# Altium PCB open-weller-pen.PcbDoc
Units mm, origin at the board's own origin, x right, y up, seen from the top; angles counter-clockwise.
Board outline 60 x 9.5 mm, 4 copper layers (Top Layer, Int1 (GND), Int2 (PWR), Bottom Layer), stack 1.642 mm thick; 46 components, 32 nets, 175 pads, 15 vias.
Unrouted connection lines stored in the file: 104.
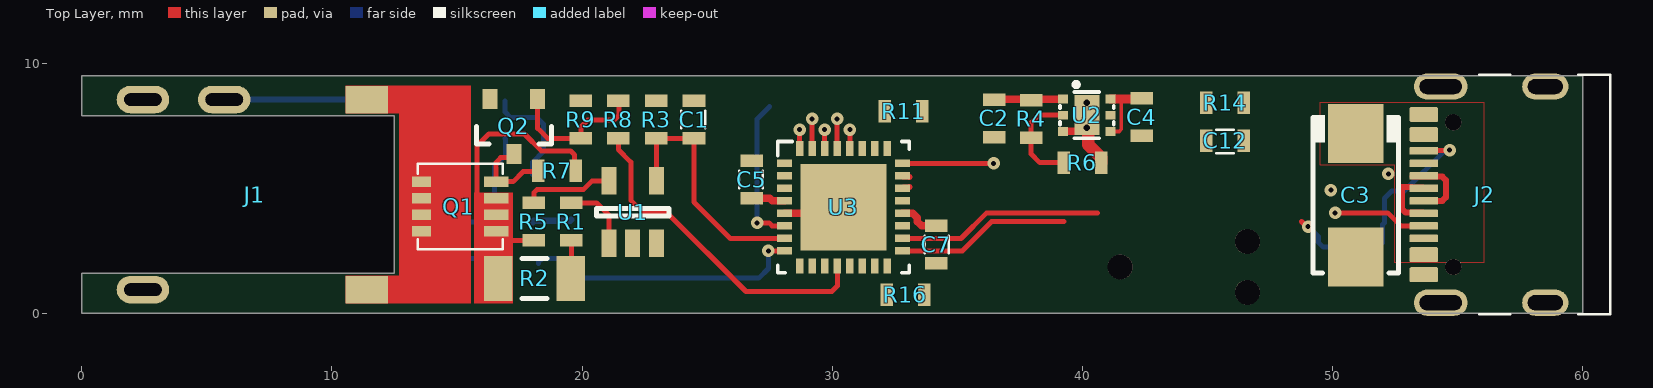
[diagram p0: Top Layer view]
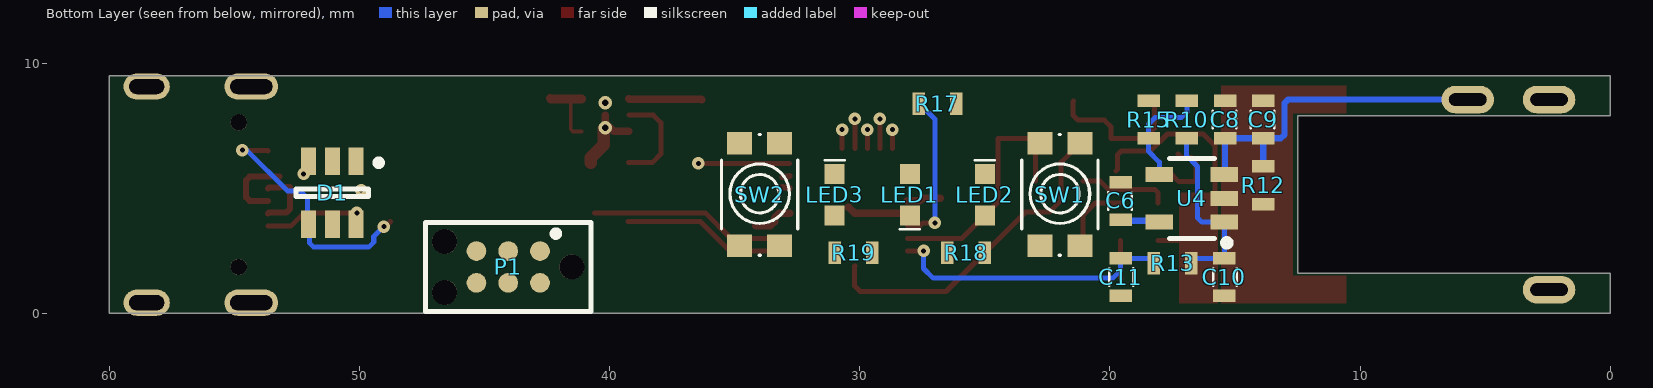
[diagram p1: Bottom Layer view, seen from below]
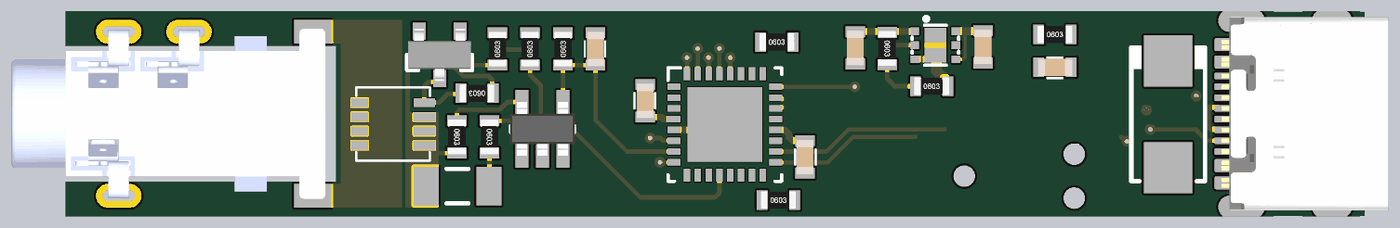
[diagram p2: 3D render of the assembled board from above, using the file's embedded part models]
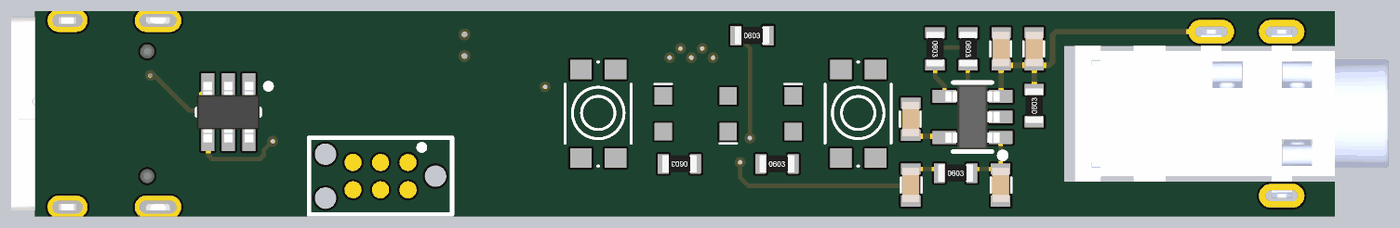
[diagram p3: 3D render of the assembled board from below, using the file's embedded part models]

## Layer stack, top to bottom
Top Solder: solder mask 0.0254, SM-001, Dk 4
Top Layer: signal copper 0.035
7628 1: prepreg 0.2184, PP-023, Dk 4.6
Int1 (GND): signal copper 0.035
CORE: core 1.065, Core-039, Dk 4.8
Int2 (PWR): signal copper 0.035
7628 2: prepreg 0.2184, PP-023, Dk 4.6
Bottom Layer: signal copper 0.035
Bottom Solder: solder mask 0.0254, SM-001, Dk 4

## Board outline
0,7.9 12.5,7.9 12.5,1.6 0,1.6 0,0 60,0 60,9.5 0,9.5

## Design rules (kind name [scope] priority, off if disabled: settings)
Clearance [All] p1: gap=0.15 ignorepadtopadclearanceinfootprint=FALSE except(0: Arc-Hole Track-Hole SMDPad-Hole THPad-Hole Via-Hole Fill-Hole Poly-Hole Region-Hole Text-Hole)
DiffPairsRouting [All] p1: maxlimit=0.254 minlimit=0.15 mostfreqgap=0.15 toplayer_minwidth=0.239 toplayer_maxwidth=0.239 toplayer_prefwidth=0.239 midlayer1_minwidth=0.239 midlayer1_maxwidth=0.239 midlayer1_prefwidth=0.239 midlayer2_minwidth=0.239 midlayer2_maxwidth=0.239 midlayer2_prefwidth=0.239 bottomlayer_minwidth=0.239 bottomlayer_maxwidth=0.239 bottomlayer_prefwidth=0.239 maxuncoupledlength=12.7
PolygonConnect [All] p1: connectstyle=Direct reliefconductorwidth=0.254 reliefentries=4 polygonreliefangle="90 Angle" airgapwidth=0.254
RoutingVias [All] p1: holewidth=0.711 width=1.27 viastyle="Through Hole" minholewidth=0.711 minwidth=1.27 maxholewidth=0.711 maxwidth=1.27
SolderMaskExpansion [All] p1: expansion=0.102 istentingtop=FALSE
Width [All] p1: maxlimit=1 minlimit=0.15 preferedwidth=0.5
29 further rules are at their usual default settings.

## Classes and differential pairs
differential pair USB: +USB_P -USB_N

## Components (designator, comment, footprint, x,y, rotation, side; value= is the part's Value field where it differs from the comment)
C1 "06035C104kAT2A" Generic_Cap0603_2_R 24.475,7.75 r270 top value=100n
C2 "GRM188R61E106KA73D" Generic_Cap0603_2_RW 36.475,7.8 r90 top
C3 "F931C107MCCAJ6" Generic_CPOL_C-2312_1P_2N_2 50.925,4.725 r270 top value=100u
C4 "GRM188R61E106KA73D" Generic_Cap0603_2_RW 42.375,7.85 r90 top
C5 "06035C104kAT2A" Generic_Cap0603_2_R 26.775,5.35 r270 top value=100n
C6 "06035C104kAT2A" Generic_Cap0603_2_R 19.575,4.5 r270 bottom value=100n
C7 "06035C104kAT2A" Generic_Cap0603_2_R 34.15,2.75 r90 top value=100n
C8 "06035C104kAT2A" Generic_Cap0603_2_R 15.4,7.75 r270 bottom value=100n
C9 "06035C103kAT2A" Generic_Cap0603_2_R 13.875,7.75 r270 bottom value=10n
C10 "06035C103kAT2A" Generic_Cap0603_2_R 15.425,1.45 r90 bottom value=10n
C11 "06035C104kAT2A" Generic_Cap0603_2_R 19.575,1.45 r90 bottom value=100n
C12 "06035C104kAT2A" Generic_Cap0603_2_R 45.7,6.9 r0 top value=100n
D1 "824015" GENERIC_SOT23-6_6_R 51.075,4.825 r270 bottom
J1 "SJ-3501-SMT-TR" CUI_SJ-3501-SMT-TR_5 0,4.75 r0 top
J2 "USB4105-GF-A" GCT_USB4105-GF-A_16_R 58.5,4.75 r90 top
LED1 "APT1608SURCK" Kingbright_1608_2_RW 28,4.75 r0 bottom locked
LED2 "APT1608SGC" Kingbright_1608_2_RW 25,4.75 r180 bottom locked
LED3 "APT1608SURCK" Kingbright_1608_2_RW 31,4.75 r180 bottom locked
P1 "TC2030-IDC-NL (SWD)" TagConnectLLC_TC2030_6 41.51,1.86 r0 bottom
Q1 "SQS141ELNW" Vishay_PowerPAK_1212-8_8 15.075,4.275 r180 top
Q2 "BSS138" Generic_SOT23_3_RWH 17.275,7.475 r180 top
R1 "RC0603FR-0733RL" Generic_Res0603_2_RW 19.575,3.675 r270 top value=33R
R2 "CSNL1206FT10L0" Generic_Res1206_2_RW 18.1,1.4 r180 top value=0.01R
R3 "RC0603FR-072K2L" Generic_Res0603_2_RW 22.975,7.75 r90 top value=2k2
R4 "RC0603FR-073K9L" Generic_Res0603_2_RW 37.95,7.775 r270 top value=3k9
R5 "RC0603FR-0733RL" Generic_Res0603_2_RW 18.075,3.675 r270 top value=33R
R6 "RC0603FR-072K2L" Generic_Res0603_2_RW 40,6.025 r0 top value=2k2
R7 "RC0603FR-0710KL" Generic_Res0603_2_RW 19,5.7 r180 top value=10k
R8 "RC0603FR-0710RL" Generic_Res0603_2_RW 21.45,7.75 r90 top value=10R
R9 "RC0603FR-0710KL" Generic_Res0603_2_RW 19.95,7.75 r90 top value=10k
R10 "RC0603FR-07100KL" Generic_Res0603_2_RW 16.925,7.75 r270 bottom value=100k
R11 "RC0603FR-0710KL" Generic_Res0603_2_RW 32.85,8.075 r0 top value=10k
R12 "RC0603FR-071ML" Generic_Res0603_2_RW 13.875,5.125 r90 bottom value=1M
R13 "RC0603FR-075K6L" Generic_Res0603_2_RW 17.5,2 r180 bottom value=5k6
R14 "RC0603FR-0768KL" Generic_Res0603_2_RW 45.7,8.425 r0 top value=68k
R15 "RC0603FR-07330RL" Generic_Res0603_2_RW 18.45,7.75 r270 bottom value=330R
R16 "RC0603FR-0712KL" Generic_Res0603_2_RW 32.925,0.75 r0 top value=12k
R17 "RC0603FR-07270RL" Generic_Res0603_2_RW 26.9,8.375 r180 bottom value=270R
R18 "RC0603FR-07270RL" Generic_Res0603_2_RW 25.75,2.425 r180 bottom value=270R
R19 "RC0603FR-07270RL" Generic_Res0603_2_RW 30.25,2.425 r0 bottom value=270R
SW1 "KMR231GLFS" CK_KMR231GLFS_4 22,4.75 r270 bottom locked
SW2 "KMR231GLFS" CK_KMR231GLFS_4 34,4.75 r270 bottom locked
U1 "SI8540-B-FWR" GENERIC_SOT23-5_5_R 22.025,4.05 r90 top
U2 "ADP7142ACPZN-R7" ANALOG_LFCSP6_7_R 40.175,7.925 r0 top
U3 "STM32G0B1KEU6N" ST_UFQFPN32_33_R 30.45,4.25 r0 top
U4 "TLV333IDBVT" TI_SOT23_5_RH 16.725,4.6 r0 bottom

## Footprints (in the part's own frame and the unit in brackets; to place one, negate y for a bottom-side part, rotate by r counter-clockwise, add the part's x,y. Pads: shape width x height; smd on the part's side, far side on the other; paste and mask are expansions set on the pad)
ANALOG_LFCSP6_7_R [mm] "ANALOG_LFCSP6_7_R"
  rect 0.4x0.35 smd mask+0.08: 1(-0.95,0.65) 2(-0.95,0) 3(-0.95,-0.65) 4(0.95,-0.65) 5(0.95,0) 6(0.95,0.65)
  rect 1x1.6 smd paste-2539.97 mask+0.08: 7(0,0)
  silkscreen extent -1.07,-0.92 1.07,1.28, body extent -1.05,-0.85 1.05,0.85, height 0.85
CK_KMR231GLFS_4 [mm] "CK_KMR231GLFS_4"
  rect 0.9x1 smd: 1(-2.05,0.8) 1(2.05,0.8) 2(-2.05,-0.8) 2(2.05,-0.8)
  silkscreen extent -2.4,-1.53 2.42,1.53, body extent -2.41,-1.52 2.41,1.52, height 2.52
CUI_SJ-3501-SMT-TR_5 [mm] "CUI_SJ-3501-SMT-TR_5"
  oval 2.1x1.1 hole 0.5 slot 1.5 at 0 deg: 1(2.45,-3.8) 3(5.7,3.8) 5(2.45,3.8)
  rect 1.7x1.1 smd: 2(11.4,3.8) 4(11.4,-3.8)
  body extent -2.5,-3.95 12,3.95, height 2.61
GCT_USB4105-GF-A_16_R [mm] "GCT_USB4105-GF-A_16_R"
  round 0.65 hole 0.65 unplated: 0(-2.89,3.68) 0(2.89,3.68)
  rrect25% 0.6x1.15 smd: A1_B12(-3.2,4.855) A4_B9(-2.4,4.855) B1_A12(3.2,4.855) B4_A9(2.4,4.855)
  rrect25% 0.3x1.15 smd: A5(-1.25,4.855) A6(-0.25,4.855) A7(0.25,4.855) A8(1.25,4.855) B5(1.75,4.855) B6(0.75,4.855) B7(-0.75,4.855) B8(-1.75,4.855)
  oval 1.05x2.15 hole 0.6 slot 1.7 at 90 deg: S1(-4.32,4.18) S4(4.32,4.18)
  oval 1.05x1.85 hole 0.6 slot 1.4 at 90 deg: S2(-4.32,0) S3(4.32,0)
  silkscreen extent -4.79,-2.6 4.79,2.65, body extent -4.47,-2.6 4.47,5.1, height 3.26
Generic_Cap0603_2_R [mm] "Generic Capacitor, 0603"
  rect 0.5x0.9 smd: 1(-0.75,0) 2(0.75,0)
  silkscreen extent -0.35,-0.5 0.35,0.45, body extent -0.8,-0.4 0.8,0.4, height 0.8
Generic_Cap0603_2_RW [mm] "Generic_Cap0603_2_RW"
  rect 0.5x0.9 smd: 1(-0.75,0) 2(0.75,0)
  body extent -0.8,-0.4 0.8,0.4, height 0.8
Generic_CPOL_C-2312_1P_2N_2 [mm] "Generic_CPOL_C-2312_1P_2N_2"
  rect 2.37x2.23 smd: 1(-2.47,0) 2(2.47,0)
  silkscreen extent -3.2,-1.7 3.1,1.7, body extent -3.05,-1.6 3.05,1.6, height 2.6
Generic_Res0603_2_RW [mm] "Generic Resistor, 0603"
  rect 0.5x0.9 smd: 1(-0.75,0) 2(0.75,0)
  body extent -0.8,-0.4 0.8,0.4, height 0.43
Generic_Res1206_2_RW [mm] "Generic Resistor, 1206"
  rect 1.15x1.8 smd: 1(-1.45,0) 2(1.45,0)
  silkscreen extent -0.5,-0.8 0.5,0.8, body extent -1.67,-0.87 1.67,0.87, height 0.75
GENERIC_SOT23-5_5_R [mm] "GENERIC_SOT23-5_5_R"
  rect 1.1x0.6 smd: 1(-1.25,0.95) 2(-1.25,0) 3(-1.25,-0.95) 4(1.25,-0.95) 5(1.25,0.95)
  silkscreen extent -0.15,-1.45 0.15,1.45, body extent -1.25,-1.5 1.25,1.5, height 1.1
GENERIC_SOT23-6_6_R [mm] "GENERIC_SOT23-6_6_R"
  rect 1.1x0.6 smd: 1(-1.25,0.95) 2(-1.25,0) 3(-1.25,-0.95) 4(1.25,-0.95) 5(1.25,0) 6(1.25,0.95)
  silkscreen extent -1.32,-1.45 0.15,1.97, body extent -1.4,-1.45 1.4,1.45, height 1.11
Generic_SOT23_3_RWH [mm] "Generic_SOT23_3_RWH"
  rect 0.6x0.8 smd: 1(-0.95,-1.1) 2(0.95,-1.1) 3(0,1.1)
  silkscreen extent -1.5,0 1.5,0.7, body extent -1.45,-1.21 1.45,1.21, height 0.97
Kingbright_1608_2_RW [mm] "Kingbright_1608_2_RW"
  rect 0.8x0.8 smd: 1(0,0.825) 2(0,-0.825)
  silkscreen extent -0.4,1.38 0.4,1.38, body extent -0.4,-0.8 0.4,0.8, height 0.75
ST_UFQFPN32_33_R [mm] "ST_UFQFPN32_33_R"
  rect 0.6x0.3 smd mask+0.05: 1(-2.35,1.75) 2(-2.35,1.25) 3(-2.35,0.75) 4(-2.35,0.25) 5(-2.35,-0.25) 6(-2.35,-0.75) 7(-2.35,-1.25) 8(-2.35,-1.75) 17(2.35,-1.75) 18(2.35,-1.25) 19(2.35,-0.75) 20(2.35,-0.25) 21(2.35,0.25) 22(2.35,0.75) 23(2.35,1.25) 24(2.35,1.75)
  rect 0.3x0.6 smd mask+0.05: 9(-1.75,-2.35) 10(-1.25,-2.35) 11(-0.75,-2.35) 12(-0.25,-2.35) 13(0.25,-2.35) 14(0.75,-2.35) 15(1.25,-2.35) 16(1.75,-2.35) 25(1.75,2.35) 26(1.25,2.35) 27(0.75,2.35) 28(0.25,2.35) 29(-0.25,2.35) 30(-0.75,2.35) 31(-1.25,2.35) 32(-1.75,2.35)
  rect 3.45x3.45 smd mask+0.05: 33(0,0)
  silkscreen extent -2.63,-2.63 2.63,2.63, body extent -2.54,-2.54 2.54,2.54, height 0.56
TagConnectLLC_TC2030_6 [mm] "TagConnectLLC_TC2030_6"
  round 0.991 hole 1 unplated: 0(0,0) 0(5.08,-1.016) 0(5.08,1.016)
  round 0.787 smd paste-5: 1(1.27,-0.635) 2(1.27,0.635) 3(2.54,-0.635) 4(2.54,0.635) 5(3.81,-0.635) 6(3.81,0.635)
  silkscreen extent -0.76,-1.78 5.84,1.78
TI_SOT23_5_RH [mm] "TI_SOT23_5_RH"
  rect 1.1x0.6 smd: 1(-1.3,0.95) 2(-1.3,0) 3(-1.3,-0.95) 4(1.3,-0.95) 5(1.3,0.95)
  silkscreen extent -1.54,-1.6 0.9,1.92, body extent -1.25,-1.5 1.25,1.5, height 1.1
Vishay_PowerPAK_1212-8_8 [mm] "Vishay_PowerPAK_1212-8_8"
  rect 0.99x0.405 smd mask+0.05: 1(-1.492,0.99) 2(-1.492,0.33) 3(-1.492,-0.33) 4(-1.492,-0.99)
  rect 0.76x0.405 smd mask+0.05: 5(1.493,-0.99) 6(1.493,-0.33) 7(1.493,0.33) 8(1.493,0.99)
  Top Layer region: 1.362,-1.117 1.362,1.118 -0.363,1.118 -0.363,-1.117
  silkscreen extent -1.75,-1.7 1.65,1.7, body extent -1.77,-1.65 1.66,1.65, height 0.76

## Part data
C1 C5 C6 C7 C8 C11 C12: library part KYOCERA_AVX_X7R-DIELECTRIC-0000-A.1, "100n, X7R, 10%, 50V, 0603", Manufacturer="Kyocera AVX", Manufacturer PartNr=06035C104kAT2A, ShortDescription=100n
C2 C4: library part Baugruppenfertigung-0041-A.5, "10uF, X5R, 10%, 25V", Manufacturer=Murata, Manufacturer PartNr=GRM188R61E106KA73D, ShortDescription=10uF
C3: library part KRSA-0126-A.1, "100u, TANTAL, 20%, 16V, C(2312)", Manufacturer=AVX, Manufacturer PartNr=F931C107MCCAJ6, ShortDescription=100u
C9 C10: library part KYOCERA_AVX_X7R-DIELECTRIC-0001-A.2, "10n, X7R, 10%, 50V, 0603", Manufacturer="Kyocera AVX", Manufacturer PartNr=06035C103kAT2A, ShortDescription=10n
D1: library part KRSA-0098-A.1, "TVS Diode Array, 5V, Unidirectional", Manufacturer=Wurth, Manufacturer PartNr=824015, ShortDescription=824015
J1: library part KRSA-0117-A.1, "Audio Jack, 3.5mm, Mid Mount", Manufacturer=CUI, Manufacturer PartNr=SJ-3501-SMT-TR, ShortDescription=SJ-3501-SMT-TR
J2: library part KRSA-0082-A.1, "USB Type C, Edge Mount, USB 2.0", Manufacturer=GCT, Manufacturer PartNr=USB4105-GF-A, ShortDescription=USB-C
LED1 LED3: library part Baugruppenfertigung-0039-A.1, "LED Red", Manufacturer=Kingbright, Manufacturer PartNr=APT1608SURCK, ShortDescription="LED Red"
LED2: library part Baugruppenfertigung-0038-A.1, "LED Green", Manufacturer=Kingbright, Manufacturer PartNr=APT1608SGC, ShortDescription="LED Green"
P1: library part 00000_Allgemein-00077-A.6, "TagConnect TC2030-IDC-NL footprint for SWD debugger.", Manufacturer=TagConnectLLC, Manufacturer PartNr=TC2030-IDC-NL, ShortDescription="6-pin Plug-of-Nails"
Q1: library part KRSA-0111-A.1, "MOSFET, P-Ch, 40V, 100A", Manufacturer=Vishay, Manufacturer PartNr=SQS141ELNW, ShortDescription=SQS141ELNW
Q2: library part 00000_Hilti_Localisation_MA-0139-A.4, "MOSFET, N-Ch, 50V, 220mA", Manufacturer=ON, Manufacturer PartNr=BSS138, ShortDescription=BSS138
R1 R5: library part YAEGO_RC0603FR-07-0019-A.2, "33R, 1%, 0.1W, 0603", Manufacturer=YAGEO, Manufacturer PartNr=RC0603FR-0733RL, ShortDescription=33R
R2: library part KRSA-0128-A.1, "0.01R, Shunt, 1W, 1%, 1206", Manufacturer="Stackpole Electronics Inc", Manufacturer PartNr=CSNL1206FT10L0, ShortDescription=0.01R
R3 R6: library part YAEGO_RC0603FR-07-0041-A.2, "2k2, 1%, 0.1W, 0603", Manufacturer=YAGEO, Manufacturer PartNr=RC0603FR-072K2L, ShortDescription=2k2
R4: library part YAEGO_RC0603FR-07-0044-A.1, "3k9, 1%, 0.1W, 0603", Manufacturer=YAGEO, Manufacturer PartNr=RC0603FR-073K9L, ShortDescription=3k9
R7 R9 R11: library part YAEGO_RC0603FR-07-0049-A.1, "10k, 1%, 0.1W, 0603", Manufacturer=YAGEO, Manufacturer PartNr=RC0603FR-0710KL, ShortDescription=10k
R8: library part YAEGO_RC0603FR-07-0013-A.2, "10R, 1%, 0.1W, 0603", Manufacturer=YAGEO, Manufacturer PartNr=RC0603FR-0710RL, ShortDescription=10R
R10: library part YAEGO_RC0603FR-07-0061-A.1, "100k, 1%, 0.1W, 0603", Manufacturer=YAGEO, Manufacturer PartNr=RC0603FR-07100KL, ShortDescription=100k
R12: library part YAEGO_RC0603FR-07-0073-A.1, "1M, 1%, 0.1W, 0603", Manufacturer=YAGEO, Manufacturer PartNr=RC0603FR-071ML, ShortDescription=1M
R13: library part YAEGO_RC0603FR-07-0046-A.1, "5k6, 1%, 0.1W, 0603", Manufacturer=YAGEO, Manufacturer PartNr=RC0603FR-075K6L, ShortDescription=5k6
R14: library part YAEGO_RC0603FR-07-0059-A.1, "68k, 1%, 0.1W, 0603", Manufacturer=YAGEO, Manufacturer PartNr=RC0603FR-0768KL, ShortDescription=68k
R15: library part YAEGO_RC0603FR-07-0031-A.2, "330R, 1%, 0.1W, 0603", Manufacturer=YAGEO, Manufacturer PartNr=RC0603FR-07330RL, ShortDescription=330R
R16: library part YAEGO_RC0603FR-07-0050-A.1, "12k, 1%, 0.1W, 0603", Manufacturer=YAGEO, Manufacturer PartNr=RC0603FR-0712KL, ShortDescription=12k
R17 R18 R19: library part YAEGO_RC0603FR-07-0030-A.2, "270R, 1%, 0.1W, 0603", Manufacturer=YAGEO, Manufacturer PartNr=RC0603FR-07270RL, ShortDescription=270R
SW1 SW2: library part 10707_OST_EuR2_Projekt-0018-A.1, "Tactile Switch, Thin Type", Manufacturer=CK, Manufacturer PartNr=KMR231GLFS, ShortDescription=KMR231GLFS
U1: library part KRSA-0131-A.1, "High-side Current Sense Amplifier", Manufacturer=Skyworks, Manufacturer PartNr=SI8540-B-FWR, ShortDescription=SI8540
U2: library part KRSA-0055-A.2, "40 V, 200 mA, Low Noise, ADJ CMOS LDO Linear Regulator", Manufacturer=Analog, Manufacturer PartNr=ADP7142ACPZN-R7, ShortDescription=ADP7142
U3: library part KRSA-0124-A.2, "Arm Cortex-M0+ 32-bit MCU up to 512KB Flash 144KB RAM, USB-PD", Manufacturer=ST, Manufacturer PartNr=STM32G0B1KEU6N, ShortDescription=STM32G0B1KEU6N
U4: library part KRSA-0108-A.1, "350kHz GBW, Low Noise, Zero Drift, 5.5V", Manufacturer=TI, Manufacturer PartNr=TLV333IDBVT, ShortDescription=TLV333

## Via types
v1: diameter 0.5, hole 0.2, Top Layer to Bottom Layer, tented both sides, 13 vias
v2: diameter 0.55, hole 0.25, Top Layer to Bottom Layer, tented bottom, 2 vias

## Nets (pads, with @x,y where several pads share a name; then routed paths per layer and width w, separated by ;. In a path a pad name is that pad's centre, name@x,y a point inside that pad or via, vN(x,y) a via of type N, cw(c..) or ccw(c..) an arc to the next point about the centre after c; other vN are vias at no path point)
3V3: C2.2 C5.2 C6.2 C7.2 D1.5 P1.1 R4.1 R12.1 U2.1 U3.4 U3.20 U4.5 | length 7.7
  Top Layer w0.3: C5.2 27.5,4.6 27.6,4.5 U3.4 ; U3.20 33.224,4 33.4,3.824 33.4,3.676 33.576,3.5 C7.2 C7.2@33.95,3.5 ; C2.2@36.325,8.55 36.338,8.563 37.95,8.563 39.213,8.563 U2.1
  Bottom Layer w0.254: U4.5 18.075,3.7 19.525,3.7 C6.2
BTN0: SW1.2 U3.29 | length 1.2
  Top Layer w0.2: U3.29 v1(30.2,7.775)
BTN1: SW2.2 U3.28 | length 0.7
  Top Layer w0.2: U3.28 v1(30.7,7.35)
CC1: D1.6 J2.A5 U3.18 | length 12
  Top Layer w0.2: U3.18 35.15,3 36.175,4.025 40.6,4.025 ; v1(50.1,4.025) 52.2,4.025 52.725,3.5 J2.A5
CC2: D1.4 J2.B5 U3.17 | length 17.1
  Top Layer w0.2: U3.17 35.2,2.5 36.375,3.675 39.258,3.675 ; 48.758,3.675 48.958,3.475 v1(49.025,3.475) ; J2.B5 53.658,6.512 54.662,6.512 v1(54.675,6.525)
  Bottom Layer w0.2: v1(49.025,3.475) 49.425,3.075 49.425,2.85 49.625,2.65 51.825,2.65 52,2.825 52,3.55 D1.4 52.075,3.625 52.075,4.6 52.375,4.9 52.875,4.9 54.5,6.525 v1(54.675,6.525)
GND: C1.1 C2.1 C3.2 C4.1 C5.1 C6.1 C7.1 C8.1 C9.1 C10.1 C11.1 C12.1 D1.2 J1.1 J1.5 J2.A1_B12 J2.B1_A12 J2.S1 J2.S2 J2.S3 J2.S4 LED1.1 LED2.1 LED3.1 P1.5 Q2.2 R3.2 R6.2 R9.2 R11.2 R15.1 R16.2 SW1.1 SW2.1 U1.2 U1.3 U2.3 U2.7 U3.5 U3.33 U4.2 | length 5.5
  Top Layer w0.3: U3.5 30.2,4 U3.33 ; U2.3 39.825,7.275 40.175,7.625 U2.7
  Top Layer w0.5: v2(40.175,7.425) 40.225,7.375 40.225,6.75 40.75,6.225 R6.2
  other v2: 40.175,8.425
HEATER_CURRENT: C1.2 R3.1 U1.4 U3.7 | length 10
  Top Layer w0.2: U1.4 R3.1 C1.2 24.475,4.45 25.925,3 U3.7
HEATER_PWM: R8.1 U3.12 | length 13.3
  Top Layer w0.2: R8.1 21.45,6.55 21.95,6.05 21.95,4.525 22.425,4.05 23.375,4.05 26.55,0.875 29.982,0.875 30.206,1.099 30.206,1.894 U3.12
LED0: R17.1 U3.32 | length 0.7
  Top Layer w0.2: U3.32 v1(28.7,7.35)
LED1: R18.1 U3.31 | length 1.2
  Top Layer w0.2: U3.31 v1(29.2,7.775)
LED2: R19.1 U3.30 | length 0.8
  Top Layer w0.2: U3.30 v1(29.7,7.35)
NetC8_2: C8.2 C9.2 J1.3 R12.2 U4.3 | length 13.7
  Bottom Layer w0.254: J1.3 12.875,8.55 13.025,8.4 13.025,7.149 13.174,7 C9.2 ; R12.2 C9.2 ; U4.3 15.4,5.575 C8.2 C9.2
NetC10_2: C10.2 R10.2 R13.2 U4.1 | length 7.4
  Bottom Layer w0.2: R13.2 16.75,2.05 16.6,2.2 C10.2 U4.1 16.325,3.65 16.5,3.825 16.5,5.875 16.95,6.325 16.95,6.975 R10.2
NetJ1_2: J1.2 J1.4 Q1.5 Q1.6 Q1.7 Q1.8
NetLED1_2: LED1.2 R17.2
NetLED2_2: LED2.2 R18.2
NetLED3_2: LED3.2 R19.2
NetQ1_1: Q1.1 Q1.2 Q1.3 R2.2 R5.2 R7.1 | length 10.7
  Top Layer w0.2: R2.2 16.725,1.475 16.725,2.525 17.125,2.925 R5.2 ; Q1.3@16.67,4.707 Q1.3 16.465,4.707 15.86,4.707 15.8,4.767 15.8,6.7 16.275,7.175 17.7,7.175 18.375,6.5 19.537,6.5 19.704,6.333 19.704,5.746 R7.1
NetQ1_4: Q1.4 Q2.3 R7.2 | length 3.5
  Top Layer w0.2: Q2.3 17.125,6.225 16.75,6.225 16.567,6.042 Q1.4 16.573,5.27 17.245,5.27 17.642,5.667 18.217,5.667 R7.2
NetQ2_1: Q2.1 R8.2 R9.1 | length 5.8
  Top Layer w0.2: Q2.1 18.225,7.4 18.625,7 R9.1 19.95,7.45 20.225,7.725 21.275,7.725 21.475,7.925 21.475,8.475 R8.2
NetR1_1: R1.1 U1.1 | length 2.8
  Top Layer w0.2: R1.1 20.575,4.425 21.075,3.925 U1.1
NetR4_2: R4.2 R6.1 U2.2 | length 4.1
  Top Layer w0.2: U2.2 38.25,7.925 37.95,7.625 R4.2 37.95,6.375 38.3,6.025 R6.1
NetR5_1: R5.1 U1.5 | length 3.6
  Top Layer w0.2: R5.1 18.075,4.825 18.2,4.95 20.054,4.95 20.404,5.3 U1.5
NetR10_1: R10.1 R15.2 U4.4 | length 4.4
  Bottom Layer w0.2: R10.1 16.925,8.05 17.15,7.825 18.2,7.825 18.45,7.575 R15.2 18.45,6.475 18.025,6.05 U4.4
NRST: P1.3 U3.6 | length 6
  Top Layer w0.2: v1(27,3.625) 27.475,3.625 27.6,3.5 U3.6
  Bottom Layer w0.2: v1(27,3.625) 27,7.775 27.5,8.275
SWCLK: P1.4 R11.1 U3.25
SWDIO: P1.2 U3.24 | length 3.7
  Top Layer w0.2: U3.24 v1(36.45,6)
  Bottom Layer w0.2: v1(36.45,6) v1@36.475,6
TIP_VOLTAGE: C11.2 R13.1 U3.8 | length 11.4
  Top Layer w0.2: v1(27.45,2.5) U3.8
  Bottom Layer w0.2: R13.1 18.25,2.05 18.4,2.2 C11.2 19.575,1.725 19.888,1.412 27.062,1.412 27.45,1.8 v1(27.45,2.5)
USB_N: D1.1 J2.A7 J2.B7 U3.22 | length 3
  Top Layer w0.239: U3.22 cw(c32.873,4.927) 32.873,5.03 33.023,5.03 ccw(c33.023,5.073) 33.053,5.043 cw(c33.083,5.013) U3.22@33.083,5.055 ; J2.A7@53.199,5.03 53.572,5.03 cw(c53.572,4.927) J2.A7 ; J2.A7@53.199,5.055 52.775,5.055 52.775,4.171 52.915,4.03 53.615,4.03 J2.B7
  other v1: 49.925,4.925
USB_P: D1.3 J2.A6 J2.B6 U3.23 | length 3.3
  Top Layer w0.239: U3.23 ccw(c32.873,5.573) 32.873,5.47 33.023,5.47 cw(c33.023,5.427) 33.053,5.457 ccw(c33.083,5.487) U3.23@33.083,5.445 ; J2.B6@53.199,5.47 53.572,5.47 ccw(c53.572,5.573) J2.B6 53.675,5.47 54.385,5.47 54.525,5.329 54.525,4.64 54.385,4.5 J2.A6
  other v1: 52.225,5.575
VBUS: C3.1 C4.2 J2.A4_B9 J2.B4_A9 R1.2 R2.1 R14.1 U2.4 U2.6 | length 4.5
  Top Layer w0.15: U2.4 41.462,7.275 41.55,7.363 41.55,8.575
  Top Layer w0.2: R2.1 19.575,1.425 R1.2
  Top Layer w0.3: U2.6 U2.6@41.15,8.6
  Top Layer w0.35: U2.6 41.55,8.575 42.35,8.575 C4.2
VBUS_SENSE: C12.2 R14.2 R16.1 U3.16
pads on no net: J2.0 J2.A8 J2.B8 P1.0 P1.6 U2.5 U3.1 U3.2 U3.3 U3.9 U3.10 U3.11 U3.13 U3.14 U3.15 U3.19 U3.21 U3.26 U3.27

## Polygon pours and split planes (outlines as drawn)
VBUS on Top Layer "VBUS_L01_P000" (solid, pour order 0): 49.475,5.95 52.463,5.95 52.463,2.05 56.05,2.05 56.05,8.425 49.475,8.425

## Other copper
Top Layer:
  region net NetQ1_1: 15.7,0.4 15.7,4.825 17.225,4.825 17.225,0.4
  region net NetJ1_2: 10.55,9.1 15.55,9.1 15.55,0.4 10.55,0.4 10.55,1.5 12.7,1.5 12.7,8 10.55,8

## Text inside footprints (layer, text, board x,y; h text height)
J2: Mechanical 13 "PCB EDGE" at 61,10.15 h0.4 r90